# Altium PCB UKU100_001.PcbDoc (part 3 of 3)
Units mm, origin at the board's own origin, x right, y up, seen from the top; angles counter-clockwise.
Board outline 319.2 x 161.95 mm, 2 copper layers (Top Layer, Bottom Layer); 250 components, 337 nets, 871 pads, 490 vias.
Unrouted connection lines stored in the file: 3.
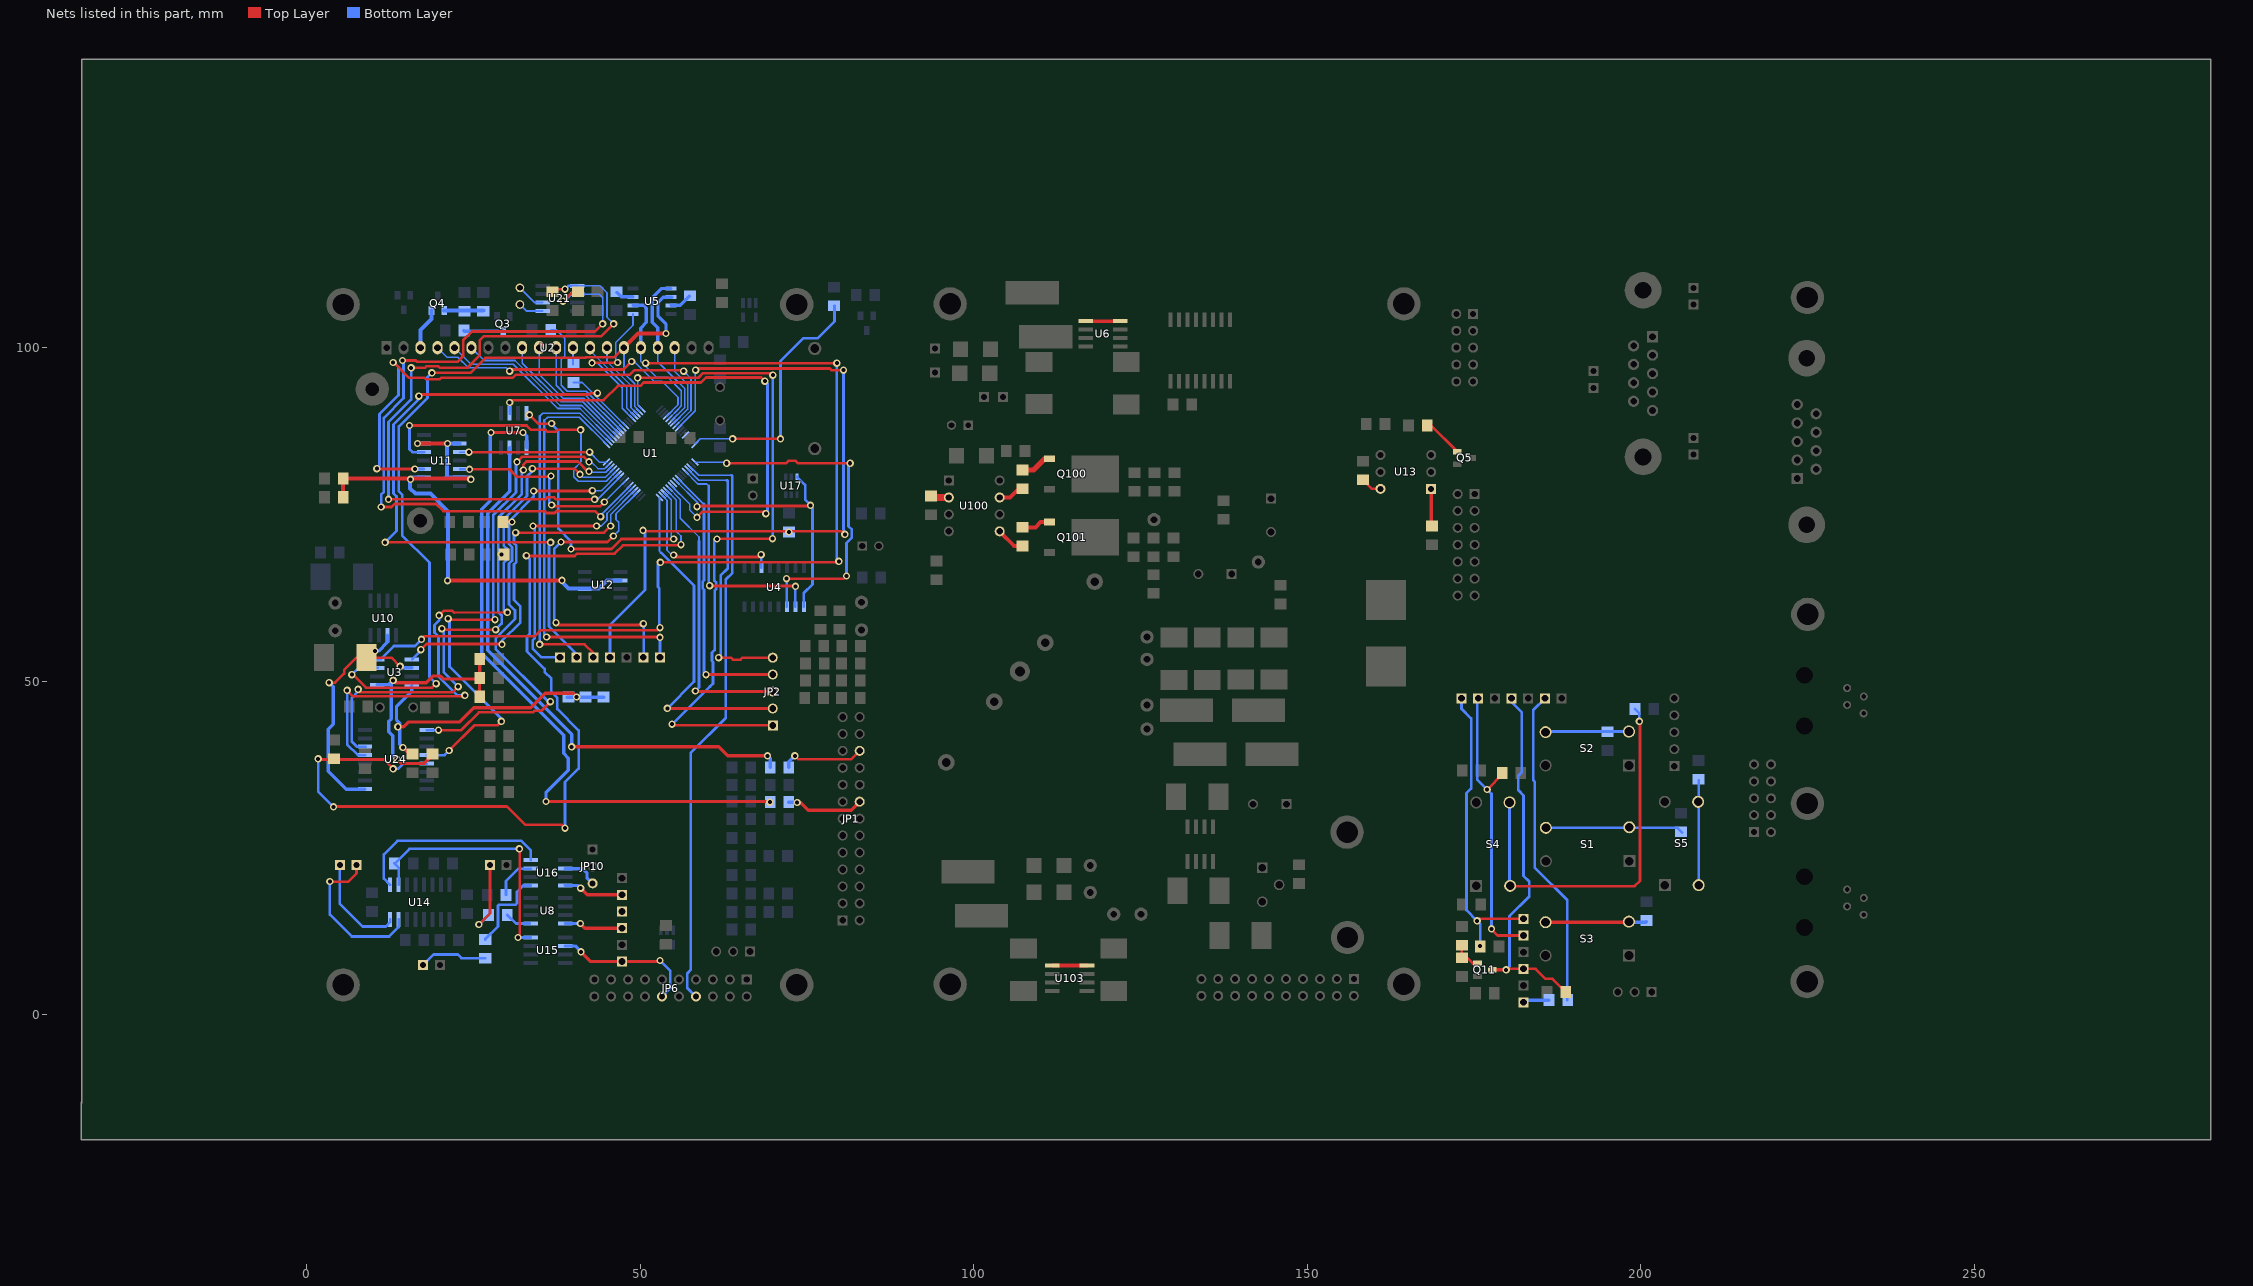
[diagram p3: the nets of this part, all layers, seen from the top]

## Via types
v1: diameter 1.1, hole 0.6, Top Layer to Bottom Layer, 338 vias
v2: diameter 1.2, hole 0.7, Top Layer to Bottom Layer, 152 vias

## Nets (pads, with @x,y where several pads share a name; then routed paths per layer and width w, separated by ;. In a path a pad name is that pad's centre, name@x,y a point inside that pad or via, vN(x,y) a via of type N, cw(c..) or ccw(c..) an arc to the next point about the centre after c; other vN are vias at no path point) (continued)
NetQ3_3: Q3.3 R10.1 | length 6
  Bottom Layer w0.5: R10.1@23.55,102.6 23.648,102.502 Q3.3@29.502,102.502
NetQ4_1: Q4.1 R89.1 R90.2 | length 6
  Bottom Layer w0.6: Q4.1@20.65,105.6 R90.2@23.85,105.6 ; R90.2@23.75,105.6 R89.1@26.5,105.6
NetQ4_2: Q4.2 U2.3 | length 6.3
  Bottom Layer w0.6: U2.3@17.103,100.031 17.103,102.653 18.75,104.3 Q4.2@18.75,105.6
NetQ5_1: Q5.1 R24.2 | length 6.1
  Top Layer w0.4: R24.2@167.988,88.393 168.607,88.393 Q5.1@172.5,84.5
NetQ11_1: Q11.1 R79.2 R80.1 | length 4.7
  Top Layer w0.4: R80.1@173.2,10.55 173.2,8.5 173.25,8.45 174.1,8.45 174.85,7.7 Q11.1@175.55,7.7
NetQ11_3: Q11.3 R81.2 X35.1 X36.1 | length 56.3
  Top Layer w0.4: v1(179.85,6.75) 180,6.9 184.25,6.9 185.75,5.4 186.8,5.4 R81.2@188.75,3.45
  Top Layer w0.5: Q11.3@177.65,6.8 177.7,6.75 v1(179.85,6.75)
  Bottom Layer w0.4: v1(179.85,6.75) 180.35,7.25 180.35,14.8 183.3,17.75 183.3,20 182.45,20.85 182.45,32.9 181.65,33.7 181.65,35.85 182.2,36.4 182.2,45.35 180.65,46.9 X35.1@180.65,47.45
NetQ100_1: Q100.1 R104.2 | length 4.7
  Top Layer w0.8: R104.2@107.3,81.7 109,81.7 110.65,83.35 Q100.1@111.35,83.35
NetQ101_1: Q101.1 R110.2 | length 4.4
  Top Layer w0.6: R110.2@107.3,73.1 109.25,73.1 110.035,73.885 Q101.1@111.375,73.885
NetR1_1: R1.1 S1.2 | length 20.7
  Bottom Layer w0.4: S1.2@185.8,28.05 205.5,28.05 R1.1@206.2,27.35
NetR2_1: R2.1 S2.2 | length 12.5
  Bottom Layer w0.4: S2.2@185.75,42.45 185.78,42.48 S2.2@198.25,42.48
NetR3_1: R3.1 S3.2 | length 15.2
  Top Layer w0.5: S3.2@185.75,13.9 S3.2@198.25,13.9
  Bottom Layer w0.5: S3.2@198.3,13.95 198.29,13.94 198.25,13.9 200.8,13.9 R3.1@200.85,13.95
NetR4_1: R4.1 S4.2 | length 58.4
  Top Layer w0.4: S4.2@180.43,19.35 180.48,19.3 199.1,19.3 199.9,20.1 199.9,43.9 v1(199.8,44)
  Bottom Layer w0.4: S4.2@180.35,31.85 180.35,19.43 S4.2@180.43,19.35 ; R4.1@199.15,45.85 199.8,45.2 v1(199.8,44)
NetR5_1: R5.1 S5.2 | length 15.7
  Bottom Layer w0.4: S5.2@208.7,19.45 R5.1@208.7,35.2
NetR25_2: R25.2 U13.1 | length 5.7
  Top Layer w0.5: U13.1@168.61,78.86 168.61,73.39 168.709,73.291 R25.2@168.75,73.25
NetR26_2: R26.2 U13.6 | length 3.1
  Top Layer w0.4: R26.2@158.4,80.2 159.74,78.86 U13.6@160.99,78.86
NetR27_2: R27.2 R28.2 U11.2 U11.6 U11.9 U11.13 U12.2 U12.6 | length 85.5
  Top Layer w0.6: R28.2@5.5,77.55 R27.2@5.5,80.45 ; R27.2@5.55,80.45 24.5,80.45 v1(24.65,80.3) ; v1(16.65,85.65) v1(21.15,85.65) ; v1(21.15,65.1) 21.2,65.15 v1(38.3,65.15)
  Bottom Layer w0.6: v1@15.55,80.25 15.55,78.95 16.35,78.15 18.6,78.15 21.25,75.5 21.25,65.2 v1(21.15,65.1) ; v1(15.6,80.3) 15.86,80.56 U11.2@17.625,80.56 ; U11.9@22.95,85.65 21.1,85.65 21.1,80.72 20.94,80.56 24.39,80.56 v1(24.65,80.3) ; v1(38.3,65.15) 38.3,64.9 39.3,63.9 43.85,63.9 45.085,65.135 U12.6@47.075,65.135
NetR29_2: R29.2 R30.2 R31.2 R32.2 U3.5 | length 41
  Top Layer w0.5: v1(13,50.15) 13.35,49.8 17.95,49.8 18.95,50.8 20.1,50.8 20.55,50.35 R30.2@25.95,50.35 ; v1@13.7,38.2 14.2,37.7 17.65,37.7 18.9,38.95 R32.2@18.9,39.15 ; R31.2@25.95,47.6 R30.2@25.95,50.35 ; R29.2@25.951,53.299 25.993,53.257 R30.2@25.993,50.393 ; R30.2@26.05,50.45 26.047,50.447 R30.2@25.993,50.393 ; R30.2@25.95,50.35 R30.2@25.993,50.393
  Bottom Layer w0.5: U3.5@10.6,49.495 12.295,49.495 12.925,50.125 12.95,50.15 v1(13,50.15) ; v1@12.95,50.1 12.7,49.85 12.7,44.35 12.35,44 12.35,42.45 12.95,41.85 12.95,38.95 v1@13.7,38.2
  other v1: 13.55,38.35
NetR33_2: R33.2 R37.2 R39.2 R44.2 U3.4 | length 47.3
  Top Layer w0.5: v1(13.7,43.2) 14.55,43.2 15.25,43.9 22.9,43.9 25.05,46.05 33.65,46.05 35.8,48.2 40,48.2 v1@40.6,47.6 ; v1(14.45,40.1) 15.447,39.103 R44.2@15.897,39.103
  Bottom Layer w0.5: v1(14.45,40.1) 14,40.55 14,43.7 13.5,44.2 13.5,46.25 15.8,48.55 U3.4@15.8,49.45 ; R33.2@39.05,47.65 39.053,47.647 R39.2@44.553,47.647
  other v1: 40.5,47.65
NetR35_2: R35.2 U2.12 | length 2.5
  Bottom Layer w0.25: R35.2@39.95,97.5 39.963,97.513 U2.12@39.963,100.031
NetR40_2: R40.2 U7.7 | length 83.2
  Top Layer w0.5: v1(39.75,40.2) 61.8,40.2 63.15,38.85 v1(69.1,38.85)
  Bottom Layer w0.5: 30.45,82.9 30.45,78.5 27.15,75.2 27.15,54.65 39.75,42.05 v1(39.75,40.2) ; 30.465,82.9 U7.7@30.465,85 ; v1(69.1,38.85) 69.5,38.45 R40.2@69.5,37.1
NetR41_2: R41.2 U7.5 | length 103.6
  Top Layer w0.5: v1(27.65,87.3) v1(32.45,87.3) ; v1(35.9,32) 69.4,32 69.45,31.95 v1(69.45,31.9)
  Bottom Layer w0.5: v1(27.65,87.3) 27.55,87.2 27.55,77.05 26.3,75.8 26.3,54.2 38.55,41.95 38.55,39.2 39.25,38.5 39.25,36.65 35.9,33.3 v1(35.9,32) ; v1(32.45,87.3) 33.005,86.745 U7.5@33.005,85
NetR43_1: R43.1 X43.1 | length 48
  Bottom Layer w0.4: X43.1@185.65,47.45 183.9,45.7 183.9,35.2 184.15,34.95 184.15,22.05 189,17.2 R43.1@189,2.25
NetR43_2: R43.2 X44.1 | length 3.9
  Bottom Layer w0.5: X44.1@182.5,1.9 182.8,2.2 R43.2@186.25,2.2
NetR46_1: R46.1 X23.1 X24.1 | length 46.1
  Top Layer w0.4: v1(175.5,14.1) 175.8,14.4 X24.1@182.45,14.4
  Bottom Layer w0.4: X23.1@173.15,47.45 173.15,45.9 174.6,44.45 174.6,33.95 173.9,33.25 173.9,15.7 v1(175.5,14.1) 175.95,13.65 175.95,10.25 v1(175.95,10.3)
NetR47_2: R47.2 U14.10 U15.8 | length 38.1
  Top Layer w0.4: v1(31.9,24.9) 31.95,24.85 v1@31.95,11.6
  Bottom Layer w0.4: R47.2@13.15,22.75 13.825,22.075 U14.10@13.825,19.5 ; R47.2@13.25,22.7 15.45,24.9 v1(31.9,24.9) ; v1@31.95,11.6 31.955,11.605 U15.8@33.6,11.605
  other v1: 31.7,11.6
NetR48_1: R48.1 U16.3 | length 6.5
  Bottom Layer w0.4: R48.1@29.9,18 29.9,20.05 31.785,21.935 U16.3@33.6,21.935
NetR52_1: R52.1 U16.1 | length 13
  Bottom Layer w0.4: R52.1@26.8,11.3 26.8,11.35 28.7,13.25 28.7,16.35 28.85,16.5 31.3,16.5 31.55,16.75 31.55,18.45 32.495,19.395 U16.1@33.6,19.395
NetR52_2: R52.2 X6.1 | length 10.2
  Bottom Layer w0.4: X6.1@17.5,7.5 19.05,9.05 22.7,9.05 23.25,8.5 R52.2@26.8,8.5
NetR53_1: R53.1 U8.1 | length 3.9
  Bottom Layer w0.4: R53.1@30.1,15 31.4,13.7 U8.1@33.45,13.7
NetR53_2: R53.2 X10.1 | length 11.7
  Top Layer w0.4: v1(25.85,13.55) 27.5,15.2 X10.1@27.5,22.5
  Bottom Layer w0.4: v1(25.85,13.55) 25.9,13.55 27.3,14.95 R53.2@27.3,15
NetR72_1: R72.1 U5.3 | length 2.7
  Bottom Layer w0.5: R72.1@46.5,108.3 47.165,107.635 U5.3@48.95,107.635
NetR73_2: R73.2 U5.7 | length 3.3
  Bottom Layer w0.5: U5.7@54.65,106.365 56.015,106.365 R73.2@57.4,107.75
NetR82_2: R82.2 X27.1 X28.1 | length 44.4
  Top Layer w0.4: v1(177,33.8) 177.1,33.9 179.25,36.05 R82.2@179.25,36.25 ; v1(177.65,12.9) 177.6,12.85 178.55,11.9 X28.1@182.45,11.9
  Bottom Layer w0.4: X27.1@175.65,47.5 175.5,47.35 175.5,35.3 176.925,33.875 176.95,33.85 177.65,33.15 v1(177.65,12.9) ; v1@176.9,33.85 177,33.85 v1(177,33.8)
NetR104_1: R104.1 U100.7 | length 3.9
  Top Layer w0.6: U100.7@103.91,77.57 105.47,77.57 106.8,78.9 R104.1@107.3,78.9
NetR105_2: R105.2 U100.2 | length 2.8
  Top Layer w1: R105.2@93.55,77.8 93.78,77.57 U100.2@96.29,77.57
NetR110_1: R110.1 U100.5 | length 4.3
  Top Layer w0.6: U100.5@103.91,72.49 106.1,70.3 R110.1@107.3,70.3
NetU6_4: U6.4 U6.5 | length 5.1
  Top Layer w0.5: U6.5@116.9,104.05 116.945,104.005 U6.4@122,104.005
NetU11_12: 
NetU14_7: U14.7 X8.1 | length 24.2
  Top Layer w0.4: v1(3.5,20) 3.5,19.95 6.25,19.95 7.5,21.2 X8.1@7.5,22.5
  Bottom Layer w0.4: v1(3.5,20) 3.5,15.05 6.8,11.75 12.4,11.75 13.825,13.175 U14.7@13.825,14.3
NetU14_8: U14.8 X4.1 | length 15.5
  Bottom Layer w0.4: X4.1@5,22.5 5,16.65 8.4,13.25 11.9,13.25 12.555,13.905 U14.8@12.555,14.3
NetU14_9: U14.9 U16.4 | length 29.9
  Bottom Layer w0.4: U14.9@12.55,19.5 11.6,20.45 11.6,24.05 13.65,26.1 32.2,26.1 33.6,24.7 U16.4@33.6,23.205
NetU21_1: U21.1 Y2.2 | length 3.9
  Bottom Layer w0.3: Y2.2@31.95,106.55 33.005,105.495 U21.1@35.4,105.495
NetU21_2: U21.2 Y2.1 | length 4.3
  Bottom Layer w0.3: Y2.1@32,109 34.235,106.765 U21.2@35.4,106.765
NetU103_4: U103.4 U103.5 | length 5.2
  Top Layer w0.6: U103.5@111.85,7.4 111.9,7.4 111.905,7.405 U103.4@117,7.405
NetX33_1: X33.1
P0_0: U1.19 X42.1 | length 47.4
  Top Layer w0.4: v1(37.4,58.8) 37.75,58.45 50.4,58.45 v1@50.5,58.55 ; v1(38.15,70.9) 45.1,70.9 v1(46,71.8)
  Bottom Layer w0.25: v1(46,71.8) 46.8,72.6 46.8,73.85 46.4,74.25 46.4,75.111 U1.19@49.567,78.278
  Bottom Layer w0.4: v1(37.4,58.8) 37.15,59.05 37.15,69.9 v1(38.15,70.9) ; v1@50.5,58.55 50.55,58.5 X42.1@50.55,53.6
  other v1: 50.5,58.65
P0_1: U1.21 X22.1 | length 41.2
  Top Layer w0.4: v1(33.95,73.3) v1(43.5,73.3)
  Bottom Layer w0.25: v1(43.5,73.3) 44.2,73.3 45.05,74.15 45.05,75.175 U1.21@48.86,78.985
  Bottom Layer w0.4: v1(33.95,73.3) 34.2,73.05 34.2,56.45 33.9,56.15 33.9,54.9 35.2,53.6 X22.1@38,53.6 X22.1@38,53.65
P0_2: R75.1 U1.22 U21.6 | length 111.3
  Top Layer w0.4: v1(11.2,76.15) 12.75,76.15 13.2,76.6 19.45,76.6 20.521,75.529 35.721,75.529 36,75.25 37.221,75.25 37.521,75.55 37.95,75.55 ; v1(14.4,98.1) 16.4,98.1 16.6,97.9 22.65,97.9 23.5,98.75 23.5,101.15 24.8,102.45 43.25,102.45 v1(44.4,103.6) ; 37.95,75.529 43.271,75.529 v1(44.1,74.7) ; v1(38.45,107) 38.55,107 39.9,108.35 R75.1@40.8,108.35
  Bottom Layer w0.25: U21.6@40.6,108.035 43.865,108.035 44.4,107.5 v1(44.4,103.6) ; v1(44.1,74.7) 44.1,74.9 U1.22@48.55,79.35
  Bottom Layer w0.4: v1(11.2,76.15) 11.2,78 11.6,78.4 11.6,89.5 14.55,92.45 14.55,97.95 v1(14.4,98.1) ; v1(38.45,107) 38.6,107 39.635,108.035 U21.6@40.6,108.035
P0_3: R74.1 U1.26 U21.5 | length 106
  Top Layer w0.4: v1(12.3,77.3) 35.8,77.3 36.1,77.6 37.1,77.6 37.4,77.3 v1(43.2,77.3) ; v1(15.7,97) 17.75,97 18,97.25 19.75,97.25 20,97 24.1,97 26,98.9 26,101.15 26.6,101.75 44.2,101.75 v1(46.05,103.6) ; R74.1@37.05,108.4 37.45,108.8 v1(38.75,108.8)
  Bottom Layer w0.25: U21.5@40.6,109.305 43.995,109.305 45.05,108.25 45.05,104.6 v1(46.05,103.6) ; v1(43.2,77.3) 43.65,77.3 U1.26@47.05,80.7
  Bottom Layer w0.4: v1(12.3,77.3) 12.3,88.85 15.7,92.25 v1(15.7,97) ; v1(38.75,108.8) 39.255,109.305 U21.5@40.6,109.305
P0_4: R45.1 U1.27 U24.1 | length 73.9
  Top Layer w0.4: v1(19.8,42.7) 23.2,42.7 25.85,45.35 33.94,45.35 34.19,45.6 35.2,45.6 v1(36.55,46.95) ; v1(34.05,78.55) 42.8,78.55 v1(42.85,78.6)
  Top Layer w0.5: R45.1@29.512,73.907 30.793,73.907 v1(30.8,73.9)
  Bottom Layer w0.25: v1(42.85,78.6) 44.232,78.6 U1.27@46.739,81.106
  Bottom Layer w0.4: U24.1@18.05,42.7 v1(19.8,42.7) ; v1(34.05,78.55) 34.05,77.7 30.35,74 30.35,70.6 30.8,70.15 30.8,68.1 30.35,67.65 30.35,61.55 31.25,60.65 31.25,59.35 28.35,56.45 28.35,54.85 36.25,46.95 v1(36.55,46.95)
P0_5: U1.29 U24.13 | length 92.6
  Top Layer w0.4: v1(6.1,48.65) 7,47.75 23.6,47.75 v1(23.75,47.9) ; v1(19.9,59.9) 20.6,60.6 21.85,60.6 22.15,60.3 v1(30.1,60.35) ; v1(30.1,60.35) v1@30.15,60.3 ; v1(30.1,60.35) v1@30.15,60.35 ; v1(33.85,81.9) 40.15,81.9 v1(41,81.05)
  Bottom Layer w0.25: v1(41,81.05) 41.45,80.6 44.818,80.6 U1.29@46.032,81.813
  Bottom Layer w0.4: v1(6.1,48.65) 6.1,40.55 7.715,38.935 U24.13@8.775,38.935 ; v1(19.9,59.9) 19.9,59.15 19.2,58.45 19.2,57.3 19.8,56.7 19.8,50.75 22.65,47.9 v1(23.75,47.9) ; v1(30.1,60.35) 29.9,60.35 29.55,60.7 29.55,67.75 30.25,68.45 30.25,69.7 29.55,70.4 29.55,74.3 33.05,77.8 33.05,80.75 33.85,81.55 v1(33.85,81.9)
P0_6: R49.1 U1.30 U24.14 | length 85
  Top Layer w0.4: v1@7.75,48.45 7.85,48.35 21.9,48.35 v1(22.75,49.2) ; v1(20.3,57.9) 20.45,57.75 v1(28.35,57.75) ; v1(32.5,81.7) 32.5,82.5 32.95,82.95 40.7,82.95 42.15,81.5 v1(42.35,81.5)
  Bottom Layer w0.25: v1(42.35,81.5) 42.5,81.35 44.85,81.35 U1.30@45.667,82.167
  Bottom Layer w0.4: v1@7.75,48.45 6.8,47.5 6.8,40.95 7.55,40.2 U24.14@8.85,40.2 ; v1(20.3,57.9) 20.6,57.6 20.6,51.35 v1(22.75,49.2) ; v1(28.35,57.75) 29.25,58.65 29.25,59.9 28.75,60.4 28.75,74.55 32.25,78.05 32.25,81.45 v1(32.5,81.7) ; v1@28.95,69.05 v1(29.2,69.05)
  other v1: 7.75,48.8
P0_7: U1.31 U24.4 | length 79.4
  Top Layer w0.4: v1(21.25,59.4) 21.4,59.25 v1(28.25,59.25) ; v1(21.4,39.65) 25.15,43.4 28.6,43.4 v1(29.2,44) ; v1(31.55,82.9) 32.3,83.65 41.6,83.65 v1(42.35,82.9)
  Bottom Layer w0.25: v1(42.35,82.9) 42.7,82.9 43.7,81.9 44.704,81.9 U1.31@45.324,82.521
  Bottom Layer w0.4: U24.4@18.025,38.935 20.685,38.935 v1(21.4,39.65) ; v1(21.25,59.4) 21.45,59.2 21.45,52.2 29.25,44.4 29.25,44.05 v1(29.2,44) ; v1(28.25,59.25) 28,59.5 28,74.95 31.4,78.35 31.4,82.75 v1(31.55,82.9)
P0_8: U1.33 X46.1 | length 63.8
  Top Layer w0.4: v1(36,56.65) 52.95,56.65 v1(53,56.6)
  Bottom Layer w0.25: 35.65,89.1 36.15,89.6 40.897,89.6 U1.33@44.971,85.526
  Bottom Layer w0.4: 35.65,89.1 35.65,57 v1(36,56.65) ; X46.1@53,53.6 v1@53,56.6
P0_9: U1.34 X30.1 | length 55.8
  Top Layer w0.4: v1(34.95,55.55) 41.7,55.55 43,54.25 X30.1@43,53.6
  Bottom Layer w0.25: 34.95,89.75 35.4,90.2 41.004,90.2 U1.34@45.324,85.879
  Bottom Layer w0.4: v1(34.95,55.55) 34.95,89.75
P0_10: U1.35 U2.5 | length 29.2
  Bottom Layer w0.25: U2.5@22.183,100.031 24.664,97.55 31,97.55 37.65,90.9 41.011,90.9 U1.35@45.678,86.233
P0_11: U1.37 U2.9 | length 20.8
  Bottom Layer w0.25: U2.9@32.35,100.05 32.35,97.7 38.15,91.9 41.425,91.9 U1.37@46.385,86.94
P0_12: U1.38 U2.10 | length 19.5
  Bottom Layer w0.25: U2.10@34.883,100.031 34.883,96.017 38.45,92.45 41.582,92.45 U1.38@46.739,87.294
P0_13: U1.39 U2.11 | length 18.1
  Bottom Layer w0.25: U2.11@37.423,100.031 37.423,94.377 38.8,93 41.739,93 U1.39@47.092,87.647
P0_14: R35.1 U1.41 X26.1 | length 106.2
  Top Layer w0.4: v1(11.8,70.85) v1(36.6,70.85) ; v1(16.85,92.75) 17.1,93 42.4,93 42.6,93.2 v1(43.6,93.2)
  Bottom Layer w0.25: R35.1@40,94.8 41.354,94.8 U1.41@47.799,88.354 ; v1@43.167,92.987 43.387,92.987 v1(43.6,93.2)
  Bottom Layer w0.4: v1(11.8,70.85) 13.5,72.55 13.5,77.75 13.05,78.2 13.05,88.5 16.85,92.3 v1(16.85,92.75) ; v1(36.6,70.85) 36.35,70.6 36.35,58.25 40.5,54.1 X26.1@40.5,53.6
P0_15: U1.45 U2.13 | length 13
  Bottom Layer w0.25: U2.13@42.5,100 42.5,99.6 48,94.1 48,90.982 U1.45@49.214,89.768 ; U2.13@42.503,100 U2.13@42.503,100.031
P0_16: U1.46 U2.14 | length 11.8
  Bottom Layer w0.25: U2.14@45.043,100.031 45.043,97.957 48.65,94.35 48.65,91.039 U1.46@49.567,90.122
P0_17: U1.47 U2.15 U3.7 U5.6 | length 125.6
  Top Layer w0.4: v1(6.8,51) 6.95,51 8.9,49.05 18.85,49.05 v1(19.45,49.65) ; v1(18.8,96.25) 24.6,96.25 26.85,98.5 41.8,98.5 41.9,98.6 46.152,98.6 U2.15@47.583,100.031
  Top Layer w0.6: U2.15@47.583,100.031 49.702,102.15 v1(53.9,102.15)
  Bottom Layer w0.25: U2.15@47.583,99.117 U2.15@47.583,100.031 ; U2.15@47.6,100.05 47.6,96.2 49.2,94.6 49.2,91.196 U1.47@49.921,90.476
  Bottom Layer w0.4: v1(6.8,51) 7.85,52.05 U3.7@10.7,52.05 ; v1(18.8,96.25) 18.15,95.6 18.15,92.5 13.85,88.2 13.85,78.5 14.35,78 14.35,71.9 18.45,67.8 18.45,50.65 v1(19.45,49.65)
  Bottom Layer w0.5: v1(53.9,102.15) 53.9,103.5 52.7,104.7 52.7,106.85 53.45,107.6 U5.6@54.75,107.6
P0_18: U1.53 U2.16 U3.8 U5.2 | length 163.3
  Top Layer w0.4: v1(17.25,56.3) 17.7,56.75 34.15,56.75 35.05,57.65 52.6,57.65 v1(53,58.05) ; v1@50.55,97.75 50.6,97.7 v1(79.5,97.7) ; v1(53.05,67.85) 79.65,67.85 v1(79.8,68)
  Bottom Layer w0.25: U2.16@50.123,99.973 50.1,99.95 50.1,98 50.1,97.95 52.5,95.55 54.2,95.55 56.2,93.55 56.2,91.3 55.8,90.9 ; U1.53@54.34,89.415 55.813,90.887
  Bottom Layer w0.4: U3.8@10.6,53.305 11.105,53.305 13.1,55.3 16.25,55.3 v1(17.25,56.3) ; v1(53,58.05) 52.9,58.15 52.9,63.95 52.7,64.15 52.7,67.5 v1(53.05,67.85) ; v1(79.5,97.7) 79.5,68.3 v1(79.8,68)
  Bottom Layer w0.5: U5.2@48.95,106.365 50.535,106.365 50.95,105.95 50.95,103.8 50.123,102.973 U2.16@50.123,100.031
  other v1: 50.85,97.7
P0_19: U1.54 U2.17 U5.5 | length 25.3
  Bottom Layer w0.25: U2.17@52.65,100.05 52.65,100.044 U2.17@52.663,100.031 52.663,97.937 54.7,95.9 56.7,93.9 56.7,91.068 U1.54@54.694,89.061
  Bottom Layer w0.5: U2.17@52.6,100.05 52.65,100.1 52.65,103 51.85,103.8 51.85,104.35 51.85,107.5 53.054,108.704 ; 52.65,108.3 53.255,108.905 U5.5@54.65,108.905
P0_20: U1.55 U2.18 | length 13
  Bottom Layer w0.25: U1.55@55.047,88.708 57.045,90.705 ; U2.18@55.203,100.031 55.203,96.447 57.15,94.5 57.15,90.8 57.05,90.7
P0_21: U1.1 U4.11 | length 54.6
  Top Layer w0.4: v1(63,82.7) 71.9,82.7 72.25,83.05 73.3,83.05 73.65,82.7 v1(81.5,82.7) ; v1(71.95,65.4) 80.55,65.4 v1(80.95,65.8)
  Bottom Layer w0.25: U1.1@58.229,82.874 62.826,82.874 v1(63,82.7)
  Bottom Layer w0.4: v1(71.95,65.4) 72.005,65.345 U4.11@72.005,61.175 ; v1(80.95,65.8) 80.95,70.75 81.75,71.55 81.75,72.75 81.25,73.25 81.25,82.45 v1(81.5,82.7)
P0_22: JP6.7 U1.2 | length 86
  Bottom Layer w0.25: U1.2@57.876,82.521 58.696,81.7 64.6,81.7
  Bottom Layer w0.4: JP6.7@58.38,5.3 58.38,38.93 63.547,44.097 ; 63.55,44.1 63.547,44.097 ; 64.6,81.7 64.6,65.9 63.547,64.847 63.547,44.097
P0_22: 
P0_23: JP6.8 U1.3 | length 88.2
  Bottom Layer w0.25: U1.3@57.522,82.167 58.195,81.495 ; 58.2,81.5 58.8,80.9 63.7,80.9
  Bottom Layer w0.4: JP6.8@58.35,2.75 57.1,4 57.1,6.25 57.6,6.75 57.6,39.25 62.85,44.5 62.85,65.25 63.85,66.25 63.85,80.75 63.7,80.9
P0_24: U1.5 U4.10 | length 35.4
  Top Layer w0.4: v1(60.45,64.35) 60.5,64.3 73.25,64.3 v1(73.3,64.25)
  Bottom Layer w0.25: U1.5@56.815,81.46 58.675,79.6 60,79.6 60.3,79.3
  Bottom Layer w0.4: 60.3,79.3 60.3,64.5 v1(60.45,64.35) ; U4.10@73.275,61.175 73.275,64.175 73.3,64.2 v1(73.3,64.25)
P0_25: U1.9 U4.9 U17.6 | length 43
  Top Layer w0.4: v1@58.65,76.3 75.45,76.3 v1(75.55,76.4)
  Bottom Layer w0.25: U1.9@55.401,80.046 58.65,76.797 v1@58.65,76.3
  Bottom Layer w0.4: U17.6@73.535,80.663 74.75,79.448 74.75,77.3 v1@75.6,76.45 ; U4.9@74.545,61.175 74.545,63.245 75.85,64.55 75.85,76.1 v1(75.55,76.4)
  other v1: 58.55,76.2
P0_27: U1.11 U7.2 | length 79
  Top Layer w0.4: v1(30.45,91.8) 30.8,92.15 44.55,92.15 46.7,94.3 50.05,94.3 50.55,94.8 59.15,94.8 59.9,95.55 68.15,95.55 v1(68.7,95) ; v1(58.55,74.6) 59.4,75.45 68.55,75.45 v1(68.85,75.15)
  Bottom Layer w0.25: U1.11@54.694,79.339 57.45,76.582 57.45,75.7 v1(58.55,74.6)
  Bottom Layer w0.4: v1(30.45,91.8) 30.45,90.15 U7.2@30.5,90.1 ; v1(68.7,95) 69.1,94.6 69.1,75.4 v1(68.85,75.15)
P0_28: 
P0_28: R97.1 U1.13 U24.5 | length 139.7
  Top Layer w0.4: v1(1.75,38.4) 1.85,38.3 11.65,38.3 13,36.95 v1(13,36.9) ; v1(4.05,31.2) 4.1,31.25 30.05,31.25 32.8,28.5 38.25,28.5 v1(38.75,28) ; v1(32.95,68.85) 33,68.8 40.2,68.8 40.55,69.15 46.2,69.15 47.45,70.4 56.05,70.4 v1(56.15,70.5)
  Bottom Layer w0.25: U1.13@53.987,78.631 54.019,78.631 55.45,77.2 55.45,72.5 56.15,71.8 v1(56.15,70.5)
  Bottom Layer w0.4: v1(1.75,38.4) 1.75,33.5 v1(4.05,31.2) ; v1(13,36.9) 13.75,36.9 14.5,37.65 U24.5@18,37.65 ; v1(32.95,68.85) 33.45,68.35 33.45,57.1 33.05,56.7 33.05,54.5 35.7,51.85 35.7,51.4 36.7,50.4 36.7,48.4 37.6,47.5 37.6,45.85 40.8,42.65 40.8,36.95 38.75,34.9 v1(38.75,28)
P0_29: U1.14 U7.4 | length 47.8
  Top Layer w0.4: v1(33.4,89.95) 34.75,88.6 v1@36.7,88.6 ; v1(39.65,69.85) 45.7,69.85 47.2,71.35 v1(55.05,71.35)
  Bottom Layer w0.25: U1.14@53.633,78.278 54.7,77.211 54.7,71.7 v1(55.05,71.35)
  Bottom Layer w0.4: U7.4@33.05,90.15 33.25,89.95 v1(33.4,89.95) ; v1@36.7,88.6 37.75,87.55 37.75,72.9 39.65,71 v1(39.65,69.85)
  other v1: 36.75,88.65
P0_30: 
P0_30: U1.15 U4.3 | length 25.2
  Top Layer w0.4: v1(55.05,68.95) 55.35,68.65 67.8,68.65 v1(68.15,69)
  Bottom Layer w0.25: U1.15@53.279,77.924 54.05,77.154 54.05,69.65 54.75,68.95 v1(55.05,68.95)
  Bottom Layer w0.4: v1(68.15,69) 68.195,68.955 U4.3@68.195,67.025
P1_16: JP2.2 U1.16 | length 51.8
  Top Layer w0.4: v1@54.11,45.94 JP2.2@69.9,45.94
  Bottom Layer w0.25: U1.16@52.926,77.571 52.926,69.524 53.15,69.3 53.55,68.9
  Bottom Layer w0.4: 53.15,69.3 58.1,64.35 58.1,49.95 v1(54.1,45.95)
P1_17: JP2.3 U1.12 | length 44.2
  Top Layer w0.4: v1(58.3,48.55) 58.3,48.5 58.32,48.48 JP2.3@69.9,48.48
  Bottom Layer w0.25: U1.12@54.3,79 U1.12@54.327,78.973 ; U1.12@54.34,78.985 56.05,77.275 56.05,74.45 58.85,71.65 58.85,71.05
  Bottom Layer w0.4: v1(58.3,48.55) 58.85,49.1 58.85,71.05
P1_18: JP2.4 U1.8 | length 41.3
  Top Layer w0.4: v1(59.9,51) 59.92,51.02 JP2.4@69.9,51.02
  Bottom Layer w0.25: U1.8@55.754,80.399 59.504,76.65 59.55,76.65
  Bottom Layer w0.4: 59.55,76.65 59.6,76.6 59.6,65.15 59.4,64.95 59.4,63.95 59.6,63.75 59.6,51.3 v1(59.9,51)
P1_19: JP2.5 U1.4 | length 42.1
  Top Layer w0.4: v1@61.8,53.56 63.64,53.56 63.95,53.25 65.09,53.25 65.39,53.55 68.35,53.55 ; 68.35,53.56 JP2.5@69.9,53.56
  Bottom Layer w0.25: U1.4@57.15,81.8 58.8,80.15 63,80.15
  Bottom Layer w0.4: v1(61.8,53.55) 62.1,53.85 62.1,65.85 63.15,66.9 63.15,80 63,80.15
P1_20: JP2.1 U1.48 | length 104.7
  Top Layer w0.4: v1(49.65,95.5) 58.75,95.5 58.878,95.628 59.45,96.2 69.6,96.2 v1@69.95,95.85 ; v1(54.8,43.6) 55,43.4 JP2.1@69.85,43.4 ; v1@61.35,71.4 v1(69.85,71.4)
  Bottom Layer w0.25: v1(49.65,95.5) 49.65,91.453 U1.48@50.274,90.829
  Bottom Layer w0.4: v1(54.8,43.6) 54.85,43.6 60.475,49.225 ; 60.5,49.2 60.95,49.65 60.95,52.9 60.8,53.05 60.8,54.3 61.2,54.7 61.2,63.6 61.4,63.8 ; v1@61.35,71.4 61.15,71.2 61.15,65.1 61.4,64.85 ; 61.45,63.8 61.45,64.85 ; v1(69.85,71.4) 69.9,71.45 v1(69.9,95.9)
  other v1: 61.55,71.35
P1_21: U1.44 U5.1 | length 23.6
  Top Layer w0.4: v1(42.8,97.75) 46.45,97.75 v1@46.55,97.85
  Bottom Layer w0.25: v1(42.8,97.75) 43.6,97.75 47.35,94 47.35,90.925 U1.44@48.86,89.415 ; v1@46.55,97.85 46.35,98.05 46.35,100.8 48.95,103.4 U5.1@48.95,105.095 48.945,105.1 U5.1@48.9,105.1
  other v1: 46.65,97.8
P1_22: R14.1 U1.40 | length 21.8
  Bottom Layer w0.25: R14.1@36.612,102.693 37.457,102.693 38.7,101.45 38.7,98.75 38.2,98.25 38.2,94.4 39.1,93.5 41.95,93.5 47.446,88.004 U1.40@47.446,88.001
P1_23: 
P1_23: U1.36 U2.6 | length 26.9
  Bottom Layer w0.25: U2.6@24.723,100.031 26.654,98.1 31.25,98.1 38,91.35 41.268,91.35 U1.36@46.032,86.586
P1_24: U1.32 U11.10 | length 22.6
  Top Layer w0.4: v1(24.35,84.35) v1(42.45,84.35)
  Bottom Layer w0.25: U11.10@22.975,84.37 22.995,84.35 v1(24.35,84.35) ; v1(42.45,84.35) 43.926,82.874 U1.32@44.971,82.874
P1_25: U1.28 U11.5 | length 46.8
  Top Layer w0.4: v1(15.45,88.35) 33,88.35 33.65,87.7 35.85,87.7 36.15,87.4 37.35,87.4 37.65,87.7 v1(41.1,87.7)
  Bottom Layer w0.25: v1(41.1,87.7) 41.15,87.65 41.15,82.9 40.05,81.8 40.05,80.7 40.75,80 44.925,80 U1.28@46.385,81.46
  Bottom Layer w0.4: v1(15.45,88.35) 15.45,84.8 15.88,84.37 U11.5@17.625,84.37
P1_26: U1.24 U11.12 | length 31.5
  Top Layer w0.4: v1(24.45,81.8) 30.4,81.8 31.5,80.7 36.55,80.7 v1(36.65,80.8) ; v1@36.6,76.45 36.8,76.25 44,76.25 v1(44.65,76.9)
  Bottom Layer w0.25: v1(44.65,76.9) 44.654,76.9 U1.24@47.799,80.046
  Bottom Layer w0.4: U11.12@23.05,81.8 v1(24.45,81.8) ; v1@36.6,76.45 36.4,76.65 36.4,80.55 v1(36.65,80.8)
  other v1: 36.75,76.45
P1_27: R34.1 U1.64 | length 37.7
  Top Layer w0.4: v1(63.9,86.35) v1(71.05,86.35)
  Bottom Layer w0.25: U1.64@58.3,85.6 59.05,86.35 v1(63.9,86.35)
  Bottom Layer w0.4: v1(71.05,86.35) 71.05,98 74.5,101.45 76.65,101.45 79.15,103.95 79.15,106.3 R34.1@79.2,106.3
P1_28: U1.60
P1_29: U1.56 U11.3 | length 79.2
  Top Layer w0.4: v1(10.55,81.9) 10.6,81.85 v1@16.15,81.85 ; v1@13.1,97.8 15.4,95.5 17.7,95.5 17.9,95.3 20,95.3 20.2,95.5 30.9,95.5 31.35,95.95 48.45,95.95 49.15,96.65 56.4,96.65 v1(56.55,96.5)
  Bottom Layer w0.25: U1.56@55.401,88.354 57.65,90.603 57.65,95.4 v1(56.55,96.5)
  Bottom Layer w0.4: v1(10.55,81.9) 10.95,82.3 10.95,90.05 13.8,92.9 13.8,97.1 v1@13.1,97.8 ; v1@16.15,81.85 U11.3@17.6,81.85
  other v1: 16.25,81.85 13,97.8
P1_30: U1.52 U2.4 | length 43.9
  Top Layer w0.4: v1(30.45,96.5) 30.7,96.75 47.55,96.75 v1(48.75,97.95)
  Bottom Layer w0.25: U2.4@19.643,100.031 21.074,98.6 22.7,98.6 24.3,97 29.95,97 v1(30.45,96.5) ; v1(48.75,97.95) 49.15,97.95 52.1,95 53.3,95 55.692,92.608 55.692,91.474 ; U1.52@53.987,89.768 55.692,91.492 55.7,91.5
P1_31: U1.20 U3.1 | length 54.7
  Top Layer w0.4: v1(17.15,54.75) 18,55.6 29.25,55.6 v1(29.3,55.55) ; v1(31.35,72.3) 44.6,72.3 v1(45.6,73.3)
  Bottom Layer w0.25: v1(45.6,73.3) 45.6,75.018 U1.20@49.214,78.631
  Bottom Layer w0.4: U3.1@15.85,53.3 17.15,54.6 v1(17.15,54.75) ; v1(29.3,55.55) 29.3,56.1 32.05,58.85 32.05,61.25 31.1,62.2 31.1,67.55 31.45,67.9 31.45,70.35 31.1,70.7 31.1,72.05 v1(31.35,72.3)
PROG0: U16.8 X29.1 | length 9.1
  Top Layer w0.5: v1(41.1,19) 42.1,18 X29.1@47.3,18
  Bottom Layer w0.5: U16.8@38.75,19.4 38.772,19.422 U16.8@38.8,19.45 ; U16.8@38.8,19.395 40.705,19.395 v1(41.1,19)
PROG1: U8.8 X37.1 | length 8.8
  Top Layer w0.5: v1(41.05,13.7) 41.75,13 X37.1@47.3,13
  Bottom Layer w0.5: U8.8@38.8,13.695 38.805,13.7 v1(41.05,13.7)
PWM1: JP1.22 R40.1 | length 12.6
  Top Layer w0.4: v1(73.2,38.85) 73.7,38.35 81.685,38.35 JP1.22@82.92,39.585 82.935,39.585 JP1.22@82.95,39.6
  Bottom Layer w0.5: R40.1@72.3,37.1 72.3,37.95 v1(73.2,38.85)
PWM2: JP1.16 R41.1 | length 11.7
  Top Layer w0.5: v1(73.55,31.85) 74.05,31.85 75.2,30.7 81.7,30.7 82.4,31.4 ; 82.378,31.422 JP1.16@82.92,31.965
  Bottom Layer w0.5: R41.1@72.3,31.9 73.5,31.9 v1(73.55,31.85)
REF: 
REF: C22.1 U3.2 U10.6 U24.9 | length 38.9
  Top Layer w0.4: v1(3.4,49.8) 4.3,49.8 5.65,51.15 5.65,51.7 7.5,53.55 12.75,53.55 v1(14.05,52.25) ; v1(10.25,54.55) C22.1@10.3,54.6
  Bottom Layer w0.5: v1(3.4,49.8) 4,49.2 4,43.6 3.25,42.85 3.25,36.55 5.945,33.855 U24.9@8.775,33.855 ; v1(10.25,54.55) 10.8,54.55 12.135,55.885 U10.6@12.135,56.9 ; v1(14.05,52.25) 14.265,52.035 U3.2@15.8,52.035
RES: D1.1 U1.57 X34.1 | length 108.6
  Top Layer w0.4: v1(50.45,72.65) 50.6,72.5 80.25,72.5 v1(80.7,72.05) ; v1(58.35,96.65) 58.6,96.9 78.45,96.9 78.7,96.65 v1(80.5,96.65)
  Bottom Layer w0.25: U1.57@55.754,88.001 58.3,90.547 58.3,96.6 v1(58.35,96.65)
  Bottom Layer w0.4: X34.1@45.5,53.6 45.5,58.45 50.75,63.7 50.75,72.35 v1(50.45,72.65) ; v1(80.5,96.65) 80.5,72.2 80.65,72.05 v1(80.7,72.05)
  other v1: 72.309,72.405
RX0: JP10.3 U16.6 | length 5.6
  Bottom Layer w0.5: U16.6@38.8,21.935 41.415,21.935 42.05,21.3 42.05,20.57 JP10.3@42.9,19.72 ; JP10.3@42.85,19.75 42.9,19.75 JP10.3@42.85,19.8
RXCAN: 
TD1: U1.10
TX0: JP6.12 U15.2 X45.1 | length 21.8
  Top Layer w0.5: v1(41.15,9.45) 42.6,8 X45.1@47.3,8 52.85,8 v1(53,8.15)
  Bottom Layer w0.4: v1(53,8.15) 54.55,6.6 54.55,4.01 JP6.12@53.3,2.76
  Bottom Layer w0.5: U15.2@38.8,10.335 40.265,10.335 v1(41.15,9.45)
U2: 
U2: 
U2: 
U2: 
U2: 
U2: 
U2: 
U2: 
U2: 
U2: 
UAKB: 
UAKB: 
UAKB: 
UAKB: 
UAKB: 
UAKB: 
UAKB: 
UAKB: 
UAKB: 
UAKB: 
UAKB: 
UAKB: 
UAKB: 
UAKB: 
UAKB: 
UAKB: 
UAKB: 
UAKB: 
UAKB: 
UAKB: 
UAKB: 
UAKB: 
UAKB: 
UAKB: 
UAKB: 
UAKB: 
UAKB: 
UAKB: 
UAKB: 
US1: 
US1: 
US1: 
US1: 
US1: 
US1: 
US1: 
US1: 
US1: 
US1: 
US1: 
US1: 
US1: 
US1: 
US1: 
US1: 
US1: 
US1: 
US1: 
US1: 
US1: 
US1: 
US1: 
US1: 
US1: 
US1: 
US1: 
US1: 
US1: 
US1: 
US1: 
US1: 
US1: 
VS: 
VS: 
VS: 
VS: 
VS: 
VS: 
VS: 
VS: 
VS: 
VS: 
VS: 
VS: 
VS: 
VS: 
VS: 
VS: 
VS: 
VS: 
VS: 
VS: 
VS: 
VS: 
VS: 
VS: 
VS: 
VS: 
VS: 
VS: 
VS: 
VS: 
pads on no net: J1.5 J1.10 J1.11 J2.1 J2.6 J2.8 J2.9 J2.10 J2.11 JP1.9 JP1.23 JP6.9 JP6.10 JP7.7 JP7.8 JP7.9 JP7.10 JP8.9 JP8.10 JP9.3 JP9.4 JP9.5 JP9.6 JP9.9 JP9.10 JP9.11 JP9.12 JP11.9 JP11.10 JP12.5 JP12.6 JP13.5 JP13.6 U2.7 U2.8 U4.4 U7.1 U7.8 U8.3 U8.4 U8.5 U8.6 U9.10 U9.11 U9.14 U10.1 U10.3 U10.5 U10.7 U10.8 U13.3 U14.11 U14.12 U14.13 U14.14 U15.3 U15.4 U15.5 U15.6 U17.1 U17.4 U19.4 U20.4 U21.3 U21.7 U24.12 U102.4 U102.8 X32.1
copper on no net: | length 0.9
  Bottom Layer w0.5: 0.65,-32 1.1,-32 ; 91.65,-31.9 92.1,-31.9

## Polygon pours and split planes (outlines as drawn)
-5V_IZ on Top Layer (hatched 90Degree grid 0.1 track 0.3, remove dead copper): 35,27 -0.5,27 -0.5,-0.8 43.8,-0.8 43.8,6.65 36.2,6.65 36.2,27
NetC103_2 on Top Layer (hatched 90Degree grid 0.1 track 0.3, remove dead copper): 136.65,63.55 147.45,63.55 147.45,75.2 136.6,75.2 136.6,63.6
NetJ2_5 on Top Layer (hatched 90Degree grid 0.1 track 0.3, remove dead copper): 211.25,112.55 190.1,112.55 190.1,79.9 211.15,79.9 211.15,112.55
NetC107_2 on Top Layer (hatched 90Degree grid 0.1 track 0.3, remove dead copper): 89.9,24.25 126.4,24.25 126.4,14.3 135.2,5.5 135.2,-0.2 90.5,-0.2 90.5,24.25 90.4,24.25 90.4,24.3
NetC5_2 on Top Layer (hatched 90Degree grid 0.1 track 0.3, remove dead copper): 124,48.4 124,40.4 127.35,37.05 127.35,28.95 128.3,28 128.3,15.45 137.55,6.2 137.55,0.55 143,0.55 143,6.5 147.6,11.1 147.6,14.6 152.05,19.05 152.05,42.9 146.05,48.9 124,48.9
NetC100_2 on Top Layer (hatched 90Degree grid 0.1 track 0.3, remove dead copper): 89.3,67.25 122.5,67.25 122.5,34.8 89.6,34.8 89.6,67.3 89.4,67.3
NetC34_1 on Top Layer (hatched 90Degree grid 0.1 track 0.3, remove dead copper): 170.75,50.15 170.75,-0.55 212.35,-0.55 212.35,50.5 170.75,50.5
GND on Top Layer (hatched 90Degree grid 0.1 track 0.3, remove dead copper): -1.45,113.7 -1.45,30.1 37.95,30.1 37.95,7.65 46.95,7.65 46.95,-0.45 88.5,-0.45 88.5,112.55 -1.45,112.55 -1.45,112.75 -1.25,112.55
+5V_IZ on Bottom Layer (hatched 90Degree grid 0.1 track 0.3, remove dead copper): -0.75,27 36.2,27 36.2,6.65 43.8,6.65 43.8,0 0,0 0,26.95 -0.75,26.95
NetC103_2 on Bottom Layer (hatched 90Degree grid 0.1 track 0.3, remove dead copper): 136.6,75.2 136.6,63.55 147.45,63.55 147.45,75.15 136.6,75.15
NetJ2_5 on Bottom Layer (hatched 90Degree grid 0.1 track 0.3, remove dead copper): 211.15,112.35 189.85,112.35 189.85,79.95 211.05,79.95 211.05,112.35
NetC107_2 on Bottom Layer (hatched 90Degree grid 0.1 track 0.3, remove dead copper): 90.05,-1.3 90.05,24.2 126.4,24.2 126.4,14.3 126.7,14 135.2,5.5 135.2,0.55 90.1,0.55 90.1,0.7
NetC100_2 on Bottom Layer (hatched 90Degree grid 0.1 track 0.3, remove dead copper): 89.65,89.8 122.55,89.8 131.7,80.65 145.4,80.65 145.4,59.65 89.95,59.65 89.95,89.8
NetC34_1 on Bottom Layer (hatched 90Degree grid 0.1 track 0.3, remove dead copper): 170.3,50.55 170.3,-1.4 212.85,-1.4 212.85,52.3 170.2,52.3 170.2,47.9
GND on Bottom Layer (hatched 90Degree grid 0.1 track 0.3, remove dead copper): -1.95,113.1 -1.95,30.1 37.95,30.1 37.95,7.7 46.95,7.7 46.95,-0.35 89.6,-0.35 89.6,113.1

## Keep-outs
Keep-Out Layer:
  circle w0.3: c11.55,119.5 r0
  circle w0.3: c11.55,119.5 r0
  circle w0.3: c11.55,119.5 r0
  circle w0.3: c11.55,119.5 r0
  circle w0.3: c11.55,119.5 r0
  circle w0.3: c11.55,119.5 r0
  circle w0.3: c11.55,119.5 r0
  circle w0.3: c203.95,0.2 r0
  lines w0.254: 168.45,59.45 168.4,59.5 179,59.5 ; 191.2,102.7 ccw(c191.163,108.2) 196.663,108.251
  lines w0.3: 88,0 0,0 0,111.7 88,111.7 88,0.05 ; 168.45,59.45 168.45,0 91,0 91,111.7 179,111.7 179,59.5 ; 171.45,0.5 171.45,49.55 210.85,49.55 210.85,3.65 205.22,3.65 ccw(c205.22,2.38) 203.95,2.38 203.95,0.2 201.5,0.2 ; 171.45,0.55 171.45,0.2 201.75,0.2 ; 191.2,102.7 191.2,80.7 200.35,80.7 ; 196.663,108.251 196.663,111.663 196.7,111.7 210.05,111.7 210.05,80.7 200.25,80.7 ; 213.8,111.65 213.85,111.7 237.5,111.7 237.5,0 213.85,0 ; 213.85,0 213.85,111.7 ; 0,107.8 0,107.8 ; 91,107.9 91,107.9

## Other copper
Top Layer:
  rectangle net NetC100_2: 109.6,67.25 112.45,71.35

## Silkscreen, mask and mechanical layers (free items; w line width, h text height)
Top Overlay:
  circle w0.5: c167.15,92.45 r10.917
  circle w0.5: c175.6,70.45 r3.102
  lines w0.3: 93.8,29.5 93.8,26.45 115.8,26.45 116.3,26.45 123.7,26.45 ; 93.9,29.5 123.75,29.5 ; 123.75,26.5 123.75,29.4
Mechanical 1:
  lines w0.25: 67,1.15 67,2.76 68.69,2.76 68.7,2.75 ; 158,1.25 158,2.86 159.69,2.86
Mechanical 3:
  lines w0.3: 185.8,2.4 185.8,49.7

## Text inside footprints (layer, text, board x,y; h text height)
JP6: Top Overlay "2" at 68.54,3.268 h1.27 r180; Top Overlay "1" at 68.54,5.808 h1.27 r180; Top Overlay "19" at 41.616,5.808 h1.27 r180; Top Overlay "20" at 41.616,3.268 h1.27 r180
JP7: Bottom Overlay "2" at 172.868,107.64 h1.27 r90; Bottom Overlay "1" at 175.408,107.132 h1.27 r90; Bottom Overlay "9" at 175.408,93.416 h1.27 r90; Bottom Overlay "10" at 172.868,93.416 h1.27 r90
JP8: Top Overlay "2" at 159.54,3.368 h1.27 r180; Top Overlay "1" at 159.54,5.908 h1.27 r180; Top Overlay "19" at 132.616,5.908 h1.27 r180; Top Overlay "20" at 132.616,3.368 h1.27 r180
JP9: Bottom Overlay "2" at 173.078,81.148 h1.27 r90; Bottom Overlay "1" at 175.618,81.148 h1.27 r90; Bottom Overlay "14" at 173.078,60.828 h1.27 r90; Bottom Overlay "13" at 175.618,60.828 h1.27 r90
JP11: Bottom Overlay "10" at 219.032,39.084 h1.27 r270; Bottom Overlay "9" at 216.492,39.084 h1.27 r270; Bottom Overlay "1" at 216.492,25.368 h1.27 r270; Bottom Overlay "2" at 219.032,24.86 h1.27 r270
Q100: Top Overlay "1" at 112.55,83.64 h1 r270; Top Overlay "3" at 112.55,79.312 h1 r270
Q101: Top Overlay "3" at 112.55,69.812 h1 r270; Top Overlay "1" at 112.55,74.14 h1 r270
U101: Top Overlay "3" at 142.35,16.75 h1 r90; Top Overlay "2" at 144.2,19.25 h1 r90; Top Overlay "1" at 142.3,22 h1 r90